# Allegro board board5DFfils2.brd
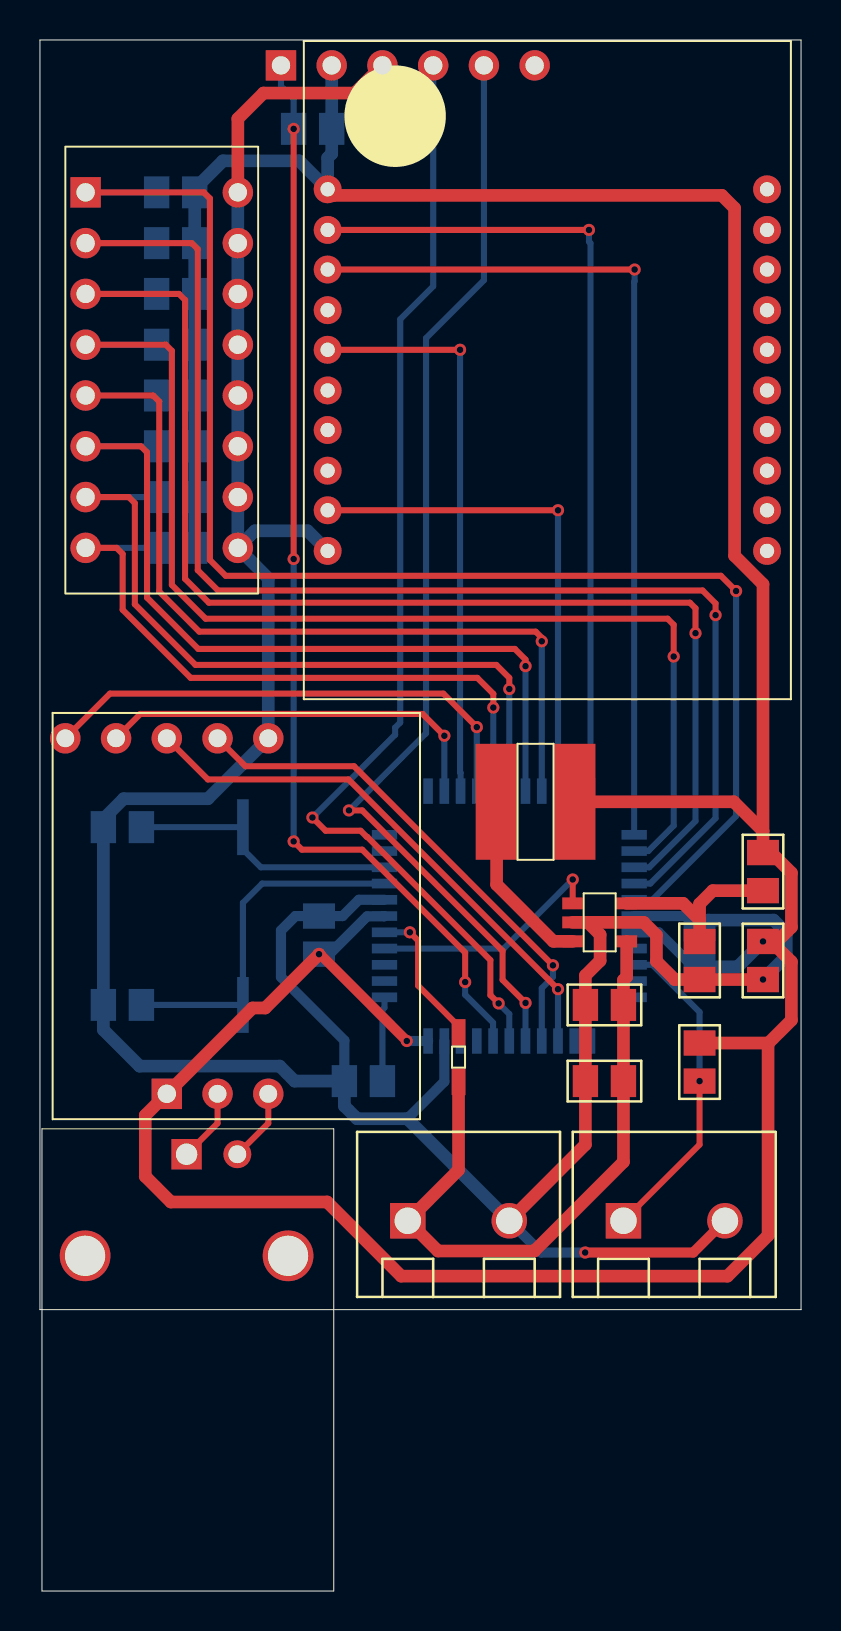
[diagram p0: board, top side]
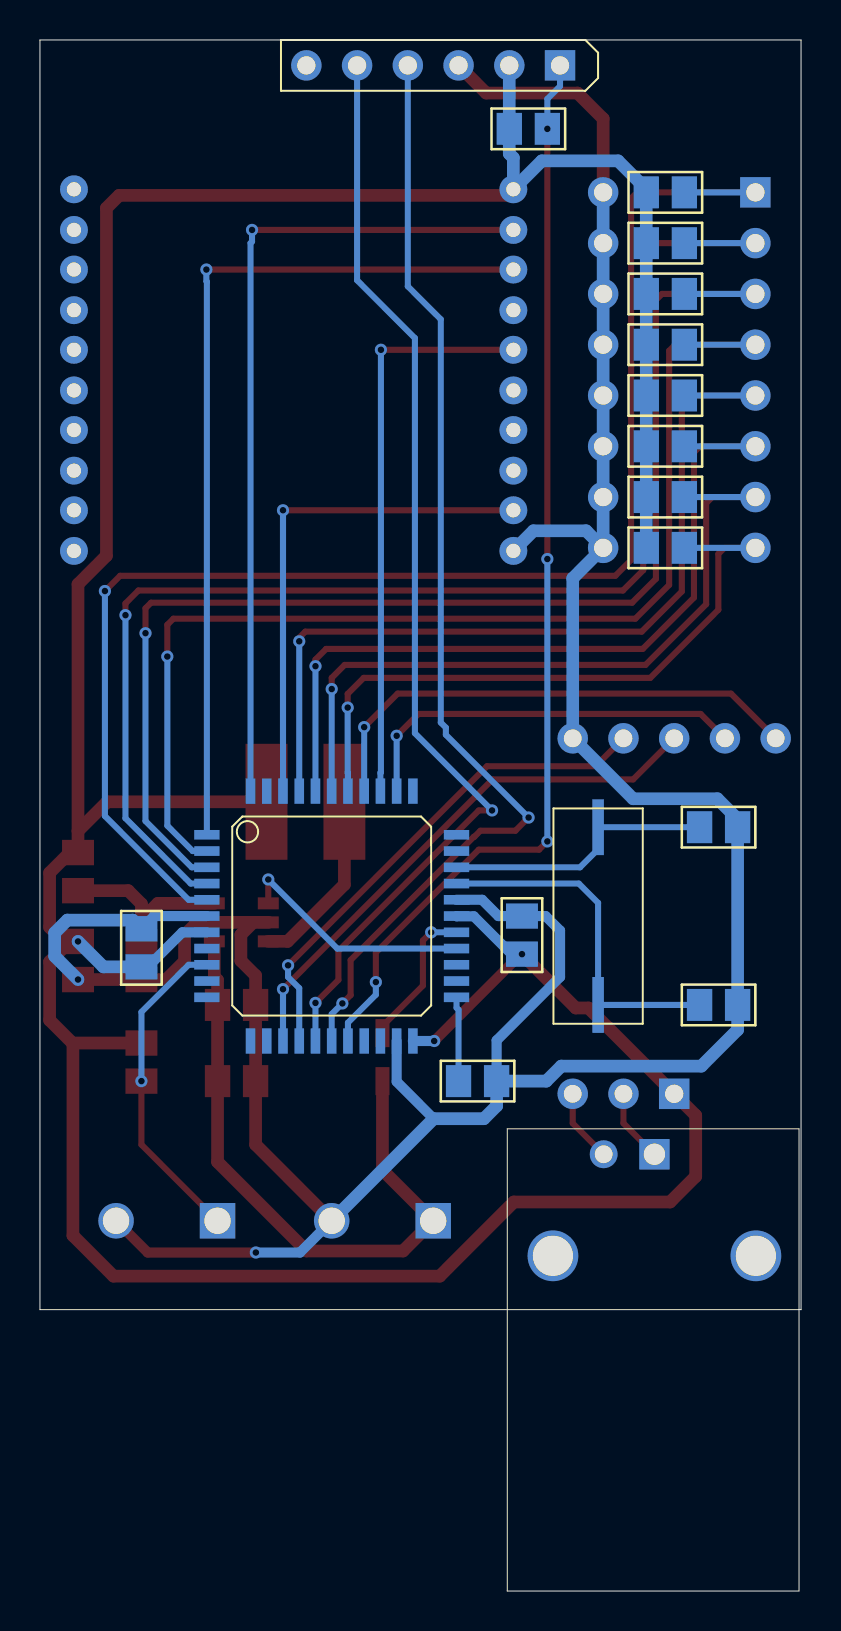
[diagram p1: board, bottom side, seen from below]

Outline 38.1 x 77.57 mm; copper layers: TOP, BOTTOM. Coordinates in mm from the lower left corner of the outline.
Outline path: 0,77.57 38.1,77.57 38.1,14.07 0,14.07 0,77.57

## Design rules (mm)
nets with their own width: min track width 0.508; nets 3.3V GND
nets with their own width: min track width 0.635; nets 4.2V(PILE) N82912 N83047

## Placement (name value [footprint] x y rotation side)
C1  10uF  [C_0805]  27.31 29.31 0 top
C2  100nF  [C_0805]  27.31 25.5 0 top
C3  22uF  [C_0805]  36.19 30.58 90 top
C4  27pF  [C_0805]  3.17 29.31 0 bottom
C5  27pF  [C_0805]  3.17 38.2 0 bottom
C6  10uF  [C_0805]  17.14 25.5 180 bottom
C7  0.1 uF  [C_0805]  13.97 31.85 90 bottom
C8  0.1 uF  [C_0805]  33.02 31.22 90 bottom
D1  Vz 6V  [DIODESOD323]  20.95 25.5 90 top
J1  HEADER 2  [CONNECTEUR_2_200]  18.41 18.52 0 top
J2  Convertion Board  [CONDUCTIVITY_SENSOR]  0.63 23.6 90 top
J3  BNC au capteur  [CONNECTEUR_BNC]  0.1 23.11 270 top
J4  Xbee  [XBEE]  25.4 61.06 0 top
J5  Connecteur PicKit  [SIP6]  12.06 76.3 270 bottom
J6  contact eau  [CONNECTEUR_2_200]  29.21 18.52 0 top
L1  10uH  [BOBINE10U100MH]  22.86 39.47 0 top
R1  61.9K  [R_0805]  36.19 35.03 90 top
R2  20K  [R_0805]  33.02 30.58 90 top
R3  4.7K  [R_0805]  14.6 73.13 180 bottom
R4  10K  [R_0805]  33.02 27.41 270 top
R5  10K  [R_0805]  5.84 69.95 0 bottom
R6  10K  [R_0805]  5.84 67.41 0 bottom
R7  10K  [R_0805]  5.84 64.87 0 bottom
R8  10K  [R_0805]  5.84 62.33 0 bottom
R9  10K  [R_0805]  5.84 59.79 0 bottom
R10  10K  [R_0805]  5.84 57.25 0 bottom
R11  10K  [R_0805]  5.84 54.71 0 bottom
R12  10K  [R_0805]  5.84 52.17 0 bottom
SW1  SW DIP-8  [DIPSWITCH]  2.29 69.95 0 top
U1  LM104/TO  [TPS560200]  26.67 34.39 0 top
U2  PIC18F47J13  [PQFP44]  23.5 33.76 180 bottom
Y1  4Mhz CRYSTAL  [CRYSTAL_SMD]  10.16 33.76 270 bottom

## Library data of the parts
C1-C3 = C
C4-C6 = CAPACITOR NON-POL
C7 C8 = CAP NP
D1 = DIODE ZENER
J1 J6 = HEADER 2
J2 = HEADER 3X2_3
J3 = BNC
J4 = HEADER 11X2_1
J5 = HEADER 6_0: User Part Number: ***
L1 = INDUCTOR
R1 R2 R4-R12 = R
R3 = RESISTOR
SW1 = SW DIP-8: User Part Number: ***
U1 = LM104/TO_3
U2 = PIC16C67_2: Tolerance: ***; User Part Number: ***
Y1 = CRYSTAL

## Footprints (pads in the part's own frame, mm; a bottom-side part is the same pattern mirrored in y, then rotated)
BOBINE10U100MH
  rect 2.1x5.8 smd: 1(0,0) 2(3.9,0)
C_0805
  rect 1.27x1.6 smd: 1(0,0) 2(1.905,0)
CONDUCTIVITY_SENSOR
  rect 1.524x1.524 hole 0.914: 1(1.27,-5.715)
  round 1.524 hole 0.889: 2(1.27,-8.255) 3(1.27,-10.795) 4(19.05,-10.795) 5(19.05,-8.255) 6(19.05,-5.715) 7(19.05,-3.175) 8(19.05,-0.635)
CONNECTEUR_2_200
  rect 1.778x1.778 hole 1.321: 1(0,0)
  round 1.778 hole 1.321: 2(5.08,0)
CONNECTEUR_BNC
  round 2.54 hole 2.007: (6.35,12.319) (6.35,2.159)
  rect 1.524x1.524 hole 1.067: 1(1.27,7.239)
  round 1.397 hole 0.889: 2(1.27,9.779)
CRYSTAL_SMD
  rect 2.794x0.584 smd: 1(-4.445,0) 2(4.445,0)
DIODESOD323
  rect 1.4x0.7 smd: 1(0,0) 2(2.4,0)
DIPSWITCH
  rect 1.524x1.524 hole 0.914: 1(0,0)
  round 1.524 hole 0.914: 2(0,-2.54) 3(0,-5.08) 4(0,-7.62) 5(0,-10.16) 6(0,-12.7) 7(0,-15.24) 8(0,-17.78) 9(7.62,-17.78) 10(7.62,-15.24) 11(7.62,-12.7) 12(7.62,-10.16) 13(7.62,-7.62) 14(7.62,-5.08) 15(7.62,-2.54) 16(7.62,0)
PQFP44
  rect 1.27x0.483 smd: 1(-6.248,4.064) 2(-6.248,3.251) 3(-6.248,2.438) 4(-6.248,1.626) 5(-6.248,0.813) 6(-6.248,0) 7(-6.248,-0.813) 8(-6.248,-1.626) 9(-6.248,-2.438) 10(-6.248,-3.251) 11(-6.248,-4.064) 23(6.248,-4.064) 24(6.248,-3.251) 25(6.248,-2.438) 26(6.248,-1.626) 27(6.248,-0.813) 28(6.248,0) 29(6.248,0.813) 30(6.248,1.626) 31(6.248,2.438) 32(6.248,3.251) 33(6.248,4.064)
  rect 0.483x1.27 smd: 12(-4.064,-6.248) 13(-3.251,-6.248) 14(-2.438,-6.248) 15(-1.626,-6.248) 16(-0.813,-6.248) 17(0,-6.248) 18(0.813,-6.248) 19(1.626,-6.248) 20(2.438,-6.248) 21(3.251,-6.248) 22(4.064,-6.248) 34(4.064,6.248) 35(3.251,6.248) 36(2.438,6.248) 37(1.626,6.248) 38(0.813,6.248) 39(0,6.248) 40(-0.813,6.248) 41(-1.626,6.248) 42(-2.438,6.248) 43(-3.251,6.248) 44(-4.064,6.248)
R_0805
  rect 1.27x1.6 smd: 1(0,0) 2(1.905,0)
SIP6
  rect 1.524x1.524 hole 0.914: 1(0,0)
  round 1.524 hole 0.914: 2(0,-2.54) 3(0,-5.08) 4(0,-7.62) 5(0,-10.16) 6(0,-12.7)
TPS560200
  rect 1.05x0.6 smd: 1(0,0) 2(0,-0.95) 3(0,-1.9) 4(2.7,-1.9) 5(2.7,0)
XBEE
  round 1.397 hole 0.711: 1(-10.998,9.042) 2(-10.998,7.01) 3(-10.998,5.029) 4(-10.998,2.997) 5(-10.998,1.016) 6(-10.998,-1.016) 7(-10.998,-2.997) 8(-10.998,-5.029) 9(-10.998,-7.01) 10(-10.998,-9.042) 11(10.998,-9.042) 12(10.998,-7.01) 13(10.998,-5.029) 14(10.998,-2.997) 15(10.998,-1.016) 16(10.998,1.016) 17(10.998,2.997) 18(10.998,5.029) 19(10.998,7.01) 20(10.998,9.042)

## Nets
3.3V: C3.2 C7.1 C8.1 J2.1 J4.1 J5.2 L1.2 R1.2 R3.1 R4.1 R5.2 R6.2 R7.2 R8.2 R9.2 R10.2 R11.2 R12.2 U2.7(VDD1) U2.22(RA3) U2.28(VDD2)
4.2V(PILE): C1.2 C2.2 D1.1(CATHODE) J1.1 U1.4(VIN)
GND: C1.1 C2.1 C3.1 C4.1 C5.1 C6.2 C7.2 C8.2 J1.2 J2.4(GND) J4.10 J5.3 J6.2 R2.1 SW1.9(B8) SW1.10(B7) SW1.11(B6) SW1.12(B5) SW1.13(B4) SW1.14(B3) SW1.15(B2) SW1.16(B1) U1.2(GND) U2.6(VSS1) U2.21(RA2) U2.29(VSS2)
CAPTEURRX: J2.6 U2.14(RB4)
CAPTEURTX: J2.5 U2.15(RB5)
CELL7: J2.7 U2.35(RC1)
CELL8: J2.8 U2.37(RC3/SCL1)
ENABLE POWER: U1.1(EN) U2.26(RE1)
XBEEDIN: J4.3 U2.1(RC7)
XBEEDOUT: J4.2 U2.44(RC6)
XBEERESET: J4.5 U2.36(RC2)
XBEESLEEP: J4.9 U2.42(RC4/SDA1/SDI)
N45185: C6.1 U2.23(VDDCORE)
N45221: J5.5 U2.16(RB6)
N45265: J5.4 U2.17(RB7)
N45305: J5.1 R3.2 U2.18(M\C\L\R\)
N56544: R5.1 SW1.1(A1) U2.5(RD7)
N56546: R6.1 SW1.2(A2) U2.4(RD6)
N56548: R7.1 SW1.3(A3) U2.3(RD5)
N56550: R8.1 SW1.4(A4) U2.2(RD4)
N56552: R9.1 SW1.5(A5) U2.41(RD3)
N56554: R10.1 SW1.6(A6) U2.40(RD2)
N56556: R11.1 SW1.7(A7) U2.39(RD1/SDA2)
N56558: R12.1 SW1.8(A8) U2.38(RD0/SCL2)
N61373: J2.2 J3.1(CENTER)
N61405: J2.3 J3.2(SHIELD)
N78069: C4.2 U2.30(OSC1/RA7) Y1.2
N78169: C5.2 U2.31(OSC2/RA6) Y1.1
N80519: J6.1 R4.2 U2.9(RB1)
N81598: D1.2(ANODE) U2.27(RE2)
N82912: R1.1 R2.2 U1.5(VSENSE)
N83047: L1.1 U1.3(PH)

Pads without a net: J4 4 6 7 8 11 12 13 14 15 16 17 18 19 20; J5 6; U2 8 10 11 12 13 19 20 24 25 32 33 34 43

## Via types
v1: diameter 0.61, hole 0.33, TOP to BOTTOM, 32 vias

## Routing (per net, layer and track width the routed paths; a pad name or vN(x,y) marks a point on that pad's centre or on a via; arc(x,y) is an arc through that point)
3.3V: length 189.2
  TOP w0.508: v1(18.36,27.51) 14.02,31.85 v1(13.97,31.85)
  TOP w0.635: L1.2 34.73,39.47 36.19,38.01 ; 36.19,38.01 R1.2 36.61,36.93 37.62,35.92 37.62,33.2 36.91,32.49 36.61,32.49 ; 36.19,38.01 36.19,50.35 34.77,51.78 34.77,69.16 34.14,69.8 14.71,69.8 J4.1 ; v1(36.19,32.49) 36.61,32.49 ; 36.61,32.49 37.62,31.47 37.62,28.55 36.47,27.41 ; v1(13.97,31.85) 11.28,29.16 10.64,29.16 5.27,23.79 5.27,20.74 6.55,19.46 14.38,19.46 18.08,15.75 34.42,15.75 36.45,17.78 36.45,27.38 36.47,27.41 ; 36.47,27.41 R4.1
  BOTTOM w0.508: C8.1 32.7,31.22 30.97,32.94 U2.7 ; v1(13.97,31.85) 14.49,31.85 16.38,33.74 17.23,33.74 U2.28 ; 19.43,27.51 v1(18.36,27.51)
  BOTTOM w0.635: J5.2 R3.1 14.6,71.88 14.4,71.68 J4.1 12.98,71.53 9.16,71.53 7.75,70.12 R5.2 R6.2 R7.2 R8.2 R9.2 R10.2 R11.2 R12.2 ; v1(36.19,32.49) 34.92,31.22 C8.1
4.2V(PILE): length 32.4
  TOP w0.635: D1.1 20.95,21.06 J1.1 19.93,17.01 24.75,17.01 29.21,21.46 C2.2 C1.2 29.21,30.56 29.37,30.72 U1.4
GND: length 161.8
  TOP w0.508: J6.2 32.7,16.93 v1(27.29,16.93)
  TOP w0.635: v1(36.19,30.58) R2.1 31.78,30.58 30.86,31.5 30.86,32.81 30.23,33.44 27.43,33.44 ; J5.3 15.76,74.92 11.19,74.92 9.91,73.63 SW1.16 ; 27.43,33.44 28.04,32.83 28.04,31.52 27.31,30.78 C1.1 C2.1 27.31,22.33 J1.2 ; 27.43,33.44 U1.2
  BOTTOM w0.508: 18.39,23.62 20.24,25.48 U2.21 ; C8.2 32.38,33.76 U2.6 ; C6.2 15.24,27.53 12.06,30.71 12.06,33.03 12.79,33.76 C7.2 15.15,33.76 15.96,34.57 U2.29 ; v1(27.29,16.93) 25.08,16.93 J1.2
  BOTTOM w0.635: SW1.9 11.43,50.65 11.43,42.65 8.41,39.62 4.19,39.62 3.17,38.61 C5.1 C4.1 3.17,28.07 4.99,26.25 12,26.25 12.75,25.5 C6.2 15.24,24.26 15.88,23.62 18.39,23.62 J1.2 ; SW1.9 10.76,53.02 13.4,53.02 J4.10 ; SW1.9 SW1.10 SW1.11 SW1.12 SW1.13 SW1.14 SW1.15 SW1.16 ; v1(36.19,30.58) 37.36,31.75 37.36,32.92 36.73,33.55 33.45,33.55 C8.2
CAPTEURRX: length 27.4
  TOP w0.305: v1(25.93,30.1) 25.52,30.51 15.44,40.59 8.41,40.59 6.35,42.65
  BOTTOM w0.305: U2.14 v1(25.93,30.1)
CAPTEURTX: length 25.5
  TOP w0.305: v1(25.68,31.29) 15.72,41.25 10.29,41.25 8.89,42.65
  BOTTOM w0.305: v1(25.68,31.29) 25.68,30.71 25.12,30.15 U2.15
CELL7: length 20.2
  TOP w0.305: 3.81,42.65 5.03,43.87 19.15,43.87 v1(20.24,42.77)
  BOTTOM w0.305: v1(20.24,42.77) U2.35
CELL8: length 25.4
  TOP w0.305: 1.27,42.65 3.51,44.88 20.19,44.88 v1(21.87,43.21)
  BOTTOM w0.305: v1(21.87,43.21) U2.37
ENABLE POWER: length 12
  TOP w0.305: v1(26.67,35.59) U1.1
  BOTTOM w0.305: U2.26 23.22,32.13 v1(26.67,35.59)
XBEEDIN: length 43.6
  TOP w0.305: J4.3 v1(29.77,66.09)
  BOTTOM w0.305: v1(29.77,66.09) 29.77,65.51 29.74,65.48 29.74,37.82
XBEEDOUT: length 41.2
  TOP w0.305: J4.2 v1(27.48,68.07)
  BOTTOM w0.305: U2.44 27.56,67.41 27.48,67.49 v1(27.48,68.07)
XBEERESET: length 28.7
  TOP w0.305: J4.5 v1(21.03,62.08)
  BOTTOM w0.305: U2.36 21.06,40.92 21.03,40.94 v1(21.03,62.08)
XBEESLEEP: length 25.6
  TOP w0.305: J4.9 v1(25.93,54.05)
  BOTTOM w0.305: v1(25.93,54.05) U2.42
N45185: length 4.2
  BOTTOM w0.305: U2.23 17.25,29.17 17.14,29.07 C6.1
N45221: length 55.6
  TOP w0.305: v1(24.31,29.41) 23.16,30.56 23.16,32.01 16.13,39.04 v1(15.47,39.04)
  BOTTOM w0.305: v1(15.47,39.04) 19.33,42.9 19.33,62.66 22.22,65.56 J5.5 ; U2.16 v1(24.31,29.41)
N45265: length 56.4
  TOP w0.305: v1(13.64,38.68) 14.3,38.02 16.05,38.02 16.36,37.72 16.38,37.72 22.55,31.55 22.55,29.8 v1(22.96,29.39)
  BOTTOM w0.305: J5.4 19.69,65.25 18.03,63.6 18.03,43.43 17.78,43.18 17.78,42.82 v1(13.64,38.68) ; v1(22.96,29.39) 23.5,28.85 U2.17
N45305: length 55
  TOP w0.305: v1(21.29,30.45) 21.29,31.93 16.14,37.08 13.11,37.08 v1(12.7,37.49) ; v1(12.7,73.13) v1(12.7,51.61)
  BOTTOM w0.305: v1(12.7,51.61) v1(12.7,37.49) ; U2.18 22.68,28.42 21.29,29.82 v1(21.29,30.45) ; v1(12.7,73.13) 12.7,74.63 12.06,75.26 J5.1
N56544: length 73.1
  TOP w0.305: SW1.1 8.2,69.95 8.51,69.65 8.51,51.56 9.3,50.77 34.09,50.77 v1(34.85,50.01)
  BOTTOM w0.305: v1(34.85,50.01) 34.85,38.76 30.66,34.57 U2.5 ; SW1.1 R5.1
N56546: length 68.1
  TOP w0.305: v1(33.82,48.81) 33.82,49.39 33.17,50.04 8.92,50.04 7.9,51.05 7.9,67.11 7.59,67.41 SW1.2
  BOTTOM w0.305: SW1.2 R6.1 ; U2.4 30.55,35.38 33.82,38.65 v1(33.82,48.81)
N56548: length 63.4
  TOP w0.305: v1(32.82,47.9) 32.82,49.15 32.54,49.43 8.46,49.43 7.26,50.62 7.26,64.57 6.96,64.87 SW1.3
  BOTTOM w0.305: U2.3 30.5,36.2 32.82,38.51 v1(32.82,47.9) ; SW1.3 R7.1
N56550: length 58.2
  TOP w0.305: v1(31.72,46.74) 31.72,48.32 31.42,48.63 8.29,48.63 6.6,50.32 6.6,62.03 6.3,62.33 SW1.4
  BOTTOM w0.305: U2.2 30.45,37.01 31.72,38.28 v1(31.72,46.74) ; SW1.4 R8.1
N56552: length 44.6
  TOP w0.305: SW1.5 5.66,59.79 5.97,59.49 5.97,49.99 7.98,47.98 24.82,47.98 25.12,47.68 v1(25.12,47.5)
  BOTTOM w0.305: SW1.5 R9.1 ; v1(25.12,47.5) U2.41
N56554: length 40.8
  TOP w0.305: v1(24.31,46.25) 24.31,46.58 23.77,47.12 7.92,47.12 5.36,49.68 5.36,56.95 5.05,57.25 SW1.6
  BOTTOM w0.305: v1(24.31,46.25) U2.40 ; SW1.6 R10.1
N56556: length 37.1
  TOP w0.305: v1(23.5,45.11) 23.5,45.67 22.85,46.32 7.79,46.32 4.75,49.35 4.75,54.41 4.44,54.71 SW1.7
  BOTTOM w0.305: v1(23.5,45.11) U2.39 ; SW1.7 R11.1
N56558: length 33.5
  TOP w0.305: v1(22.69,44.18) 22.69,44.87 21.89,45.67 7.54,45.67 4.14,49.07 4.14,51.87 3.84,52.17 SW1.8
  BOTTOM w0.305: U2.38 22.68,40.92 22.69,40.93 v1(22.69,44.18) ; SW1.8 R12.1
N61373: length 3.7
  TOP w0.305: J3.1 8.89,23.39 8.89,24.87
N61405: length 3.7
  TOP w0.305: 11.43,24.87 11.43,23.39 J3.2
N78069: length 17.7
  BOTTOM w0.305: U2.30 11.13,35.38 10.16,34.42 Y1.2 C4.2
N78169: length 13.6
  BOTTOM w0.305: C5.2 Y1.1 10.16,37.1 11.06,36.2 U2.31
N80519: length 16.3
  TOP w0.305: v1(33.02,25.5) 33.02,22.33 J6.1
  BOTTOM w0.305: U2.9 30.66,31.32 33.02,28.96 v1(33.02,25.5)
N81598: length 7.3
  TOP w0.305: D1.2 20.95,28.25 18.93,30.28 18.93,32.53 v1(18.52,32.94)
  BOTTOM w0.305: U2.27 v1(18.52,32.94)
N82912: length 9.3
  TOP w0.635: 33.02,33.57 32.19,34.39 U1.5 ; 33.02,33.57 33.02,34.37 33.68,35.03 R1.1 ; 33.02,33.57 R2.2
N83047: length 9.1
  TOP w0.635: L1.1 22.86,35.33 25.7,32.49 U1.3
